# Altium PCB Yusynth VCA faceplate.PcbDoc
Units mm, origin at the board's own origin, x right, y up, seen from the top; angles counter-clockwise.
Board outline 40.64 x 128.5 mm, 2 copper layers (Top Layer, Bottom Layer), stack 2.071 mm thick; 12 components, 1 nets, 17 pads, 0 vias.
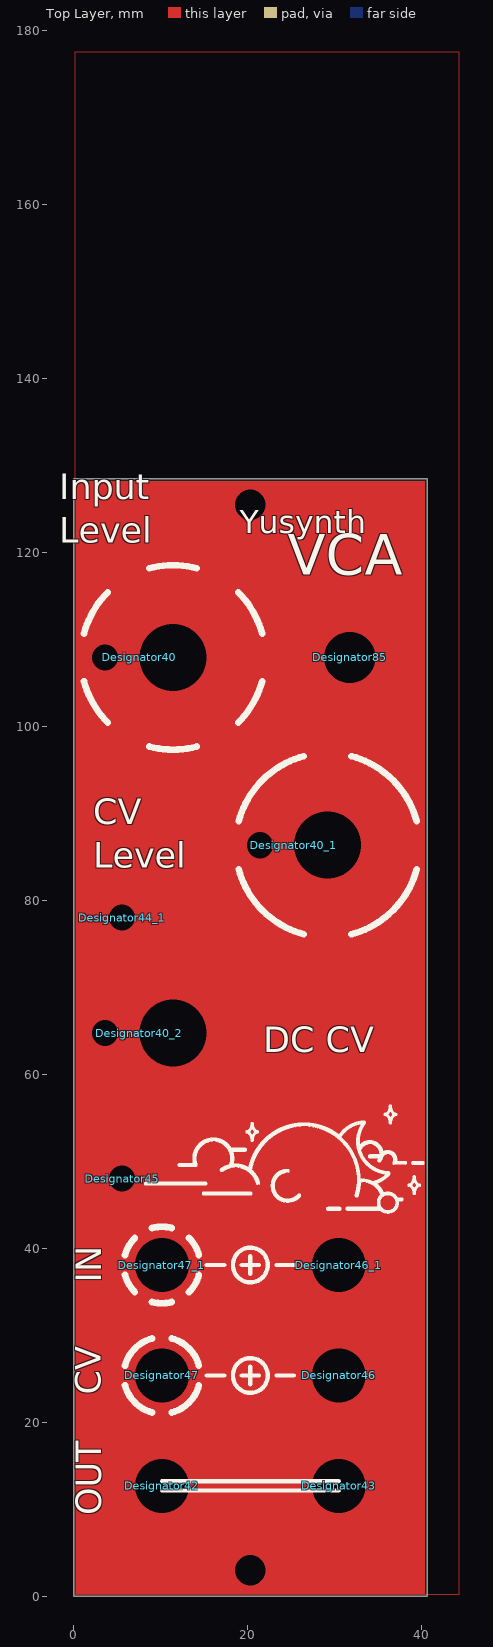
[diagram p0: Top Layer view]
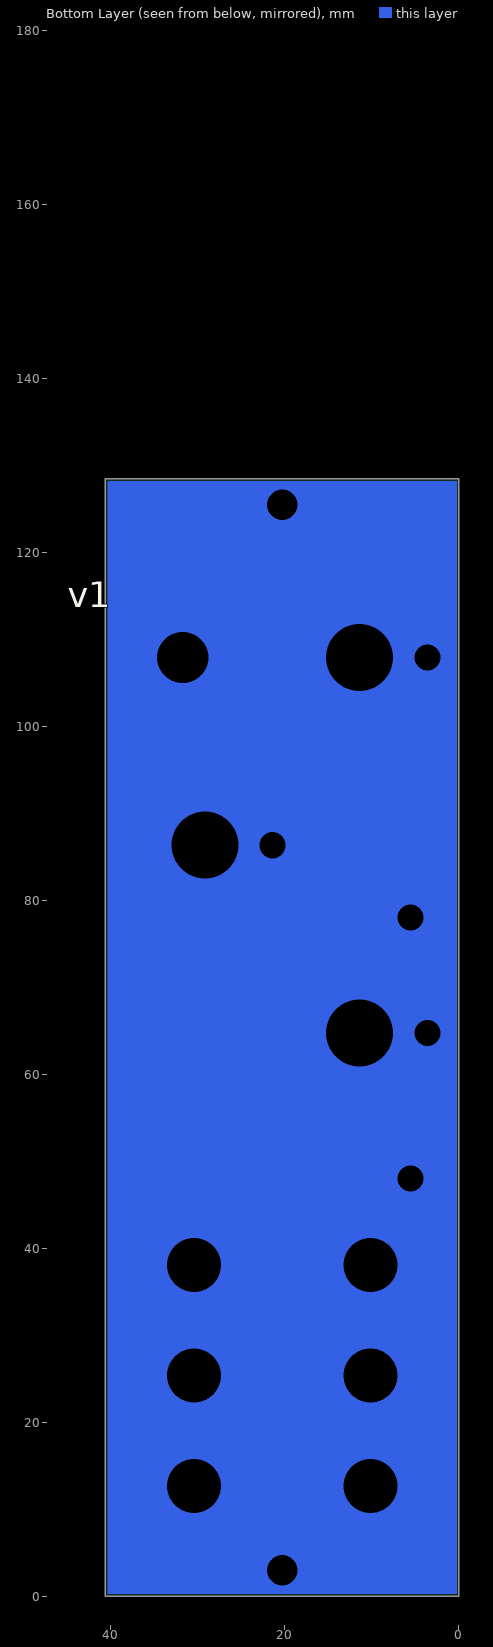
[diagram p1: Bottom Layer view, seen from below]

## Layer stack, top to bottom
Top Solder: solder mask 0.0102, Solder Resist, Dk 3.5
Top Layer: signal copper 0.0356
Dielectric 1: dielectric 2, FR-4, Dk 4.8
Bottom Layer: signal copper 0.0356
Bottom Solder: solder mask 0.0102, Solder Resist, Dk 3.5

## Board outline
0,0 40.64,0 40.64,128.5 0,128.5

## Design rules (kind name [scope] priority, off if disabled: settings)
Clearance [All] p1: gap=1
PlaneClearance [All] p1: clearance=1
PlaneConnect [All] p1: planeconnectstyle=Direct reliefexpansion=0.508 reliefentries=4 reliefconductorwidth=0.254 reliefairgap=0.254
PolygonConnect [All] p1: connectstyle=Direct reliefconductorwidth=0.254 reliefentries=4 polygonreliefangle="90 Angle" airgapwidth=0.254
RoutingVias [All] p1: holewidth=0.711 width=1.27 viastyle="Through Hole" minholewidth=0.711 minwidth=1.27 maxholewidth=0.711 maxwidth=1.27
SolderMaskExpansion [All] p1: expansion=0.102
Width [All] p1: maxlimit=0.254 minlimit=0.254 preferedwidth=0.254
28 further rules are at their usual default settings.

## Components (designator, comment, footprint, x,y, rotation, side; value= is the part's Value field where it differs from the comment)
Designator40 "Comment" POT 11.43,107.95 r0 top
Designator40_1 "Comment" POT 29.21,86.36 r0 top
Designator40_2 "Comment" POT 11.43,64.77 r0 top
Designator42 "Comment" "TS Jack" 10.16,12.7 r90 top locked
Designator43 "Comment" "TS Jack" 30.48,12.7 r270 top locked
Designator44_1 "Comment" "PCB MOUNT" 5.588,78.031 r0 top
Designator45 "Comment" "PCB MOUNT" 5.588,48.031 r0 top
Designator46 "Comment" "TS Jack" 30.48,25.4 r270 top locked
Designator46_1 "Comment" "TS Jack" 30.48,38.1 r270 top locked
Designator47 "Comment" "TS Jack" 10.16,25.4 r90 top locked
Designator47_1 "Comment" "TS Jack" 10.16,38.1 r90 top locked
Designator85 "Comment" "LED Mount - 3mm" 31.75,107.95 r0 top

## Footprints (in the part's own frame and the unit in brackets; to place one, negate y for a bottom-side part, rotate by r counter-clockwise, add the part's x,y. Pads: shape width x height; smd on the part's side, far side on the other; paste and mask are expansions set on the pad)
"LED Mount - 3mm" [mil] "MFG: Tayda, PN: A-661"
  round 60 hole 232.28: 0(0,0)
  body extent -177,-153 177,153, height 118
"PCB MOUNT" [mil]
  round 60 hole 118.11: 1(0,0)
  body extent -109,-109 110,110, height 80
POT [mil] "Tayda 17mm"
  round 60 hole 118.11: 0(-307.09,0)
  round 60 hole 303.15: 0(0,0)
  body extent -398,-531 398,398, height 528
"TS Jack" [mil] "MFG: Tayda, PN: A-865"
  round 60 hole 244.09: 0(0,0)
  body extent -177,-362 177,217, height 154

## Free pads (board coordinates)
  round 1.524 hole 3.5: 1(20.32,3) 1(20.32,125.5)

## Nets (pads, with @x,y where several pads share a name; then routed paths per layer and width w, separated by ;. In a path a pad name is that pad's centre, name@x,y a point inside that pad or via, vN(x,y) a via of type N, cw(c..) or ccw(c..) an arc to the next point about the centre after c; other vN are vias at no path point)
GND: 
pads on no net: Designator40.0 Designator40_1.0 Designator40_2.0 Designator42.0 Designator43.0 Designator44_1.1 Designator45.1 Designator46.0 Designator46_1.0 Designator47.0 Designator47_1.0 Designator85.0

## Polygon pours and split planes (outlines as drawn)
GND on Top Layer "TopGnd" (solid, shelved, pour order 0): 0.2,177.6 44.3,177.6 44.3,0.2 0.2,0.2 0.2,177.6

## Other copper
Top Layer:
  rectangle: 0.25,0.25 40.39,128.25
Bottom Layer:
  rectangle: 0.25,0.25 40.39,128.25

## Silkscreen, mask and mechanical layers (free items; w line width, h text height)
Top Overlay:
  drawing of 41 lines, arcs and shapes, not listed
  text "Yusynth" at 19.126,121.387 h4.5
  text "Input / Level" at -1.651,120.142 h5
  text "VCA" at 24.638,115.9 h8
  text "CV / Level" at 2.235,82.779 h5
  text "DC CV" at 21.819,61.595 h5
  text "IN" at 4.133,36.068 h5 r90
  text "CV" at 4.083,23.19 h5 r90
  text "OUT" at 4.133,9.322 h5 r90
Bottom Overlay:
  text "v1" at 45,112.75 h5
Mechanical 1:
  the board outline again, w0.254
Mechanical 2:
  circle w0.254: c20.32,3 r3
  circle w0.254: c20.32,125.5 r3
  lines w0.254: 0,3 5.08,3 10.16,3 15.24,3 20.32,3 25.4,3 30.48,3 35.56,3 40.64,3 ; 0,6 5.08,6 10.16,6 15.24,6 20.32,6 25.4,6 30.48,6 35.56,6 40.64,6 ; 0,122.5 5.08,122.5 10.16,122.5 15.24,122.5 20.32,122.5 25.4,122.5 30.48,122.5 35.56,122.5 40.64,122.5 ; 0,125.5 5.08,125.5 10.16,125.5 15.24,125.5 20.32,125.5 25.4,125.5 30.48,125.5 35.56,125.5 40.64,125.5
  text "Place components on 100 mil grid" at 20.32,144.78 h1.5
  text "8" at 40.386,-3.683 h0.76
  text "[HP]" at 30.607,-4.496 h0.76
  text "1.6\"" at 39.243,-5.994 h0.76
  text "inches" at 30.607,-6.731 h0.76
  text "40.64" at 38.913,-8.484 h0.76
  text "mm" at 30.607,-9.271 h0.76

## Dimensions
5.588,48.031 to 5.588,78.031 on Mechanical 2
0,0 to 0,128.5 on Mechanical 3
0,0 to 20.32,3 on Mechanical 3
0,0 to 10.16,12.7 on Mechanical 3
0,0 to 10.16,25.4 on Mechanical 3
0,0 to 10.16,38.1 on Mechanical 3
0,0 to 5.588,48.031 on Mechanical 3
0,0 to 3.63,64.77 on Mechanical 3
0,0 to 5.588,78.031 on Mechanical 3
0,0 to 21.41,86.36 on Mechanical 3
0,0 to 3.63,107.95 on Mechanical 3
0,0 to 20.32,125.5 on Mechanical 3
0,0 to 3.63,64.77 on Mechanical 3
0,0 to 5.588,48.031 on Mechanical 3
0,0 to 10.16,12.7 on Mechanical 3
0,0 to 11.43,64.77 on Mechanical 3
0,0 to 20.32,3 on Mechanical 3
0,0 to 21.41,86.36 on Mechanical 3
0,0 to 29.21,86.36 on Mechanical 3
0,0 to 30.48,12.7 on Mechanical 3
0,0 to 40.64,0 on Mechanical 3